# EAGLE board testeando_libs (EAGLE 7.2.0)
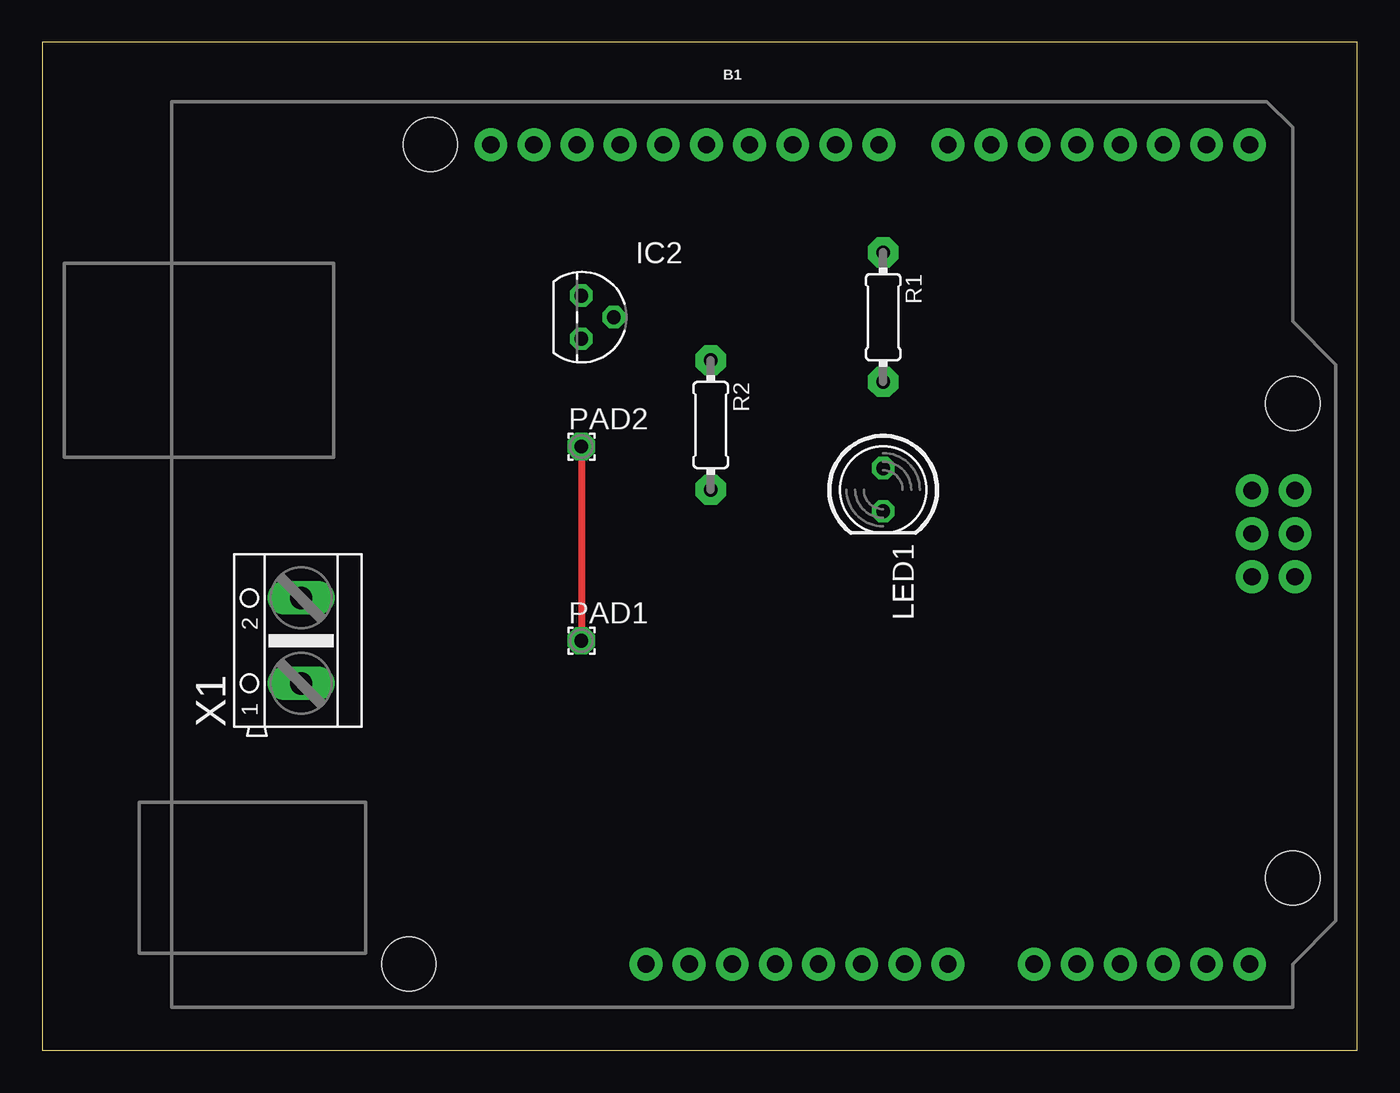
[diagram p0: board, top side]
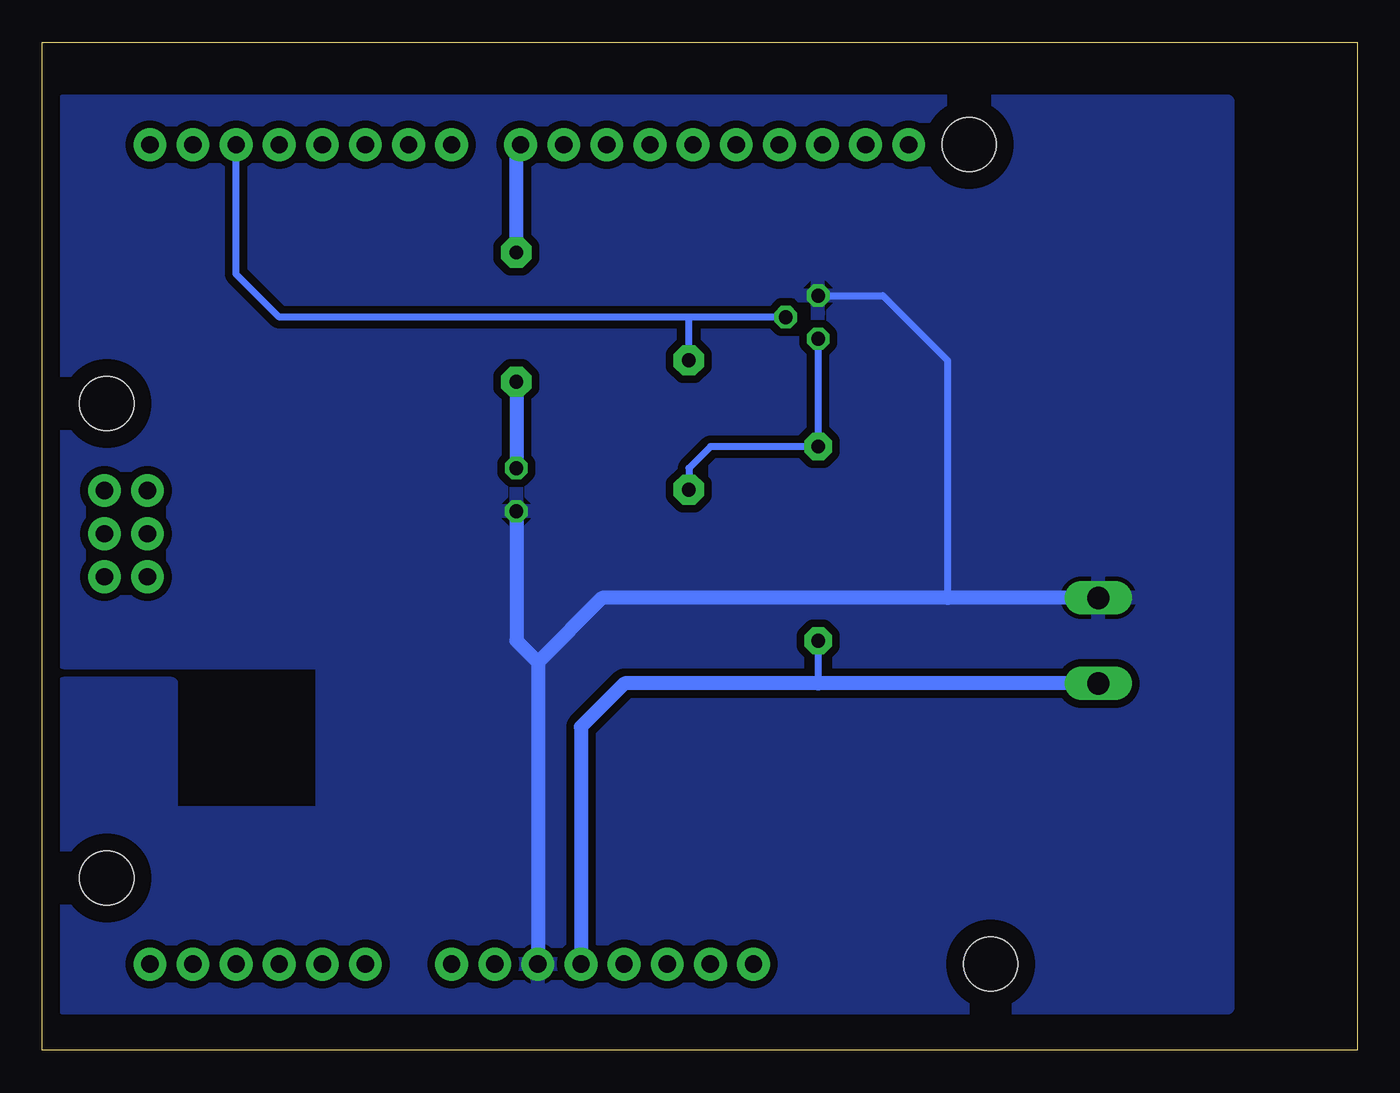
[diagram p1: board, bottom side, seen from below]

Size 77.45 x 59.36 mm. Coordinates in mm from the lower left corner, seen from the top.
Outline: 0,0 77.45,0 77.45,59.36 0,59.36 0,0
Copper layers (1*16): Top 0.035mm / dielectric 1.5mm / Bottom 0.035mm
Design rules "default *": minimum track width 10mil, minimum drill 24mil, track to track 18mil, track to pad 18mil, pad to pad 18mil, via to via 18mil, smd to smd 8mil, copper to edge 40mil, drill to drill 8mil, minimum pad ring 10mil, minimum via ring 8mil, stop-mask expansion 4mil, vias tented up to drill 0mil, thermal gap 10mil

## Footprints (pad centres in the part's own frame; a part is rotated, then mirrored left to right if it is on the bottom)
ARDUINO_R3 = drill 1.016 pad 1.93: 3.3V 2.54,-24.13; 5V 5.08,-24.13; A0 17.78,-24.13; A1 20.32,-24.13; A2 22.86,-24.13; A3 25.4,-24.13; A4 27.94,-24.13; A5 30.48,-24.13; AREF -9.144,24.13; D0 30.48,24.13; D1 27.94,24.13; D2 25.4,24.13; D3 22.86,24.13; D4 20.32,24.13; D5 17.78,24.13; D6 15.24,24.13; D7 12.7,24.13; D8 8.636,24.13; D9 6.096,24.13; D10 3.556,24.13; D11 1.016,24.13; D12 -1.524,24.13; D13 -4.064,24.13; GND@1 7.62,-24.13; GND@2 10.16,-24.13; GND@3 -6.604,24.13; GND@4 33.16,-1.32; IOREF -2.54,-24.13; MISO 30.62,3.76; MOSI 33.16,1.22; NC -5.08,-24.13; RESET@1 0,-24.13; RESET@2 30.62,-1.32; SCK 30.62,1.22; SCL -14.224,24.13; SDA -11.684,24.13; VCC 33.16,3.76; VIN 12.7,-24.13 | hole 3.175: -17.78,24.13; 33.02,8.89; 33.02,-19.05; -19.05,-24.13
TO92 = drill 0.813 octagon: 1 1.27,0; 2 0,1.905; 3 -1.27,0
LED5MM = drill 0.813 octagon: A -1.27,0; K 1.27,0
1,6/0,8 = drill 0.813 pad 1.6 octagon: 1 0,0
0204/7 = drill 0.813 pad 1.778 octagon: 1 -3.81,0; 2 3.81,0
AK500/2 = drill 1.321 long: 1 -2.515,0; 2 2.515,0

## Placement (x,y rotation side)
B1  ARDUINO_UNO_R3  [ARDUINO_R3]  40.64,29.21 0 top
IC2  DS18B20  [TO92]  31.75,43.18 270 top
LED1  [LED5MM]  49.53,33.02 270 top
PAD1  [1,6/0,8]  31.75,24.13 0 top
PAD2  [1,6/0,8]  31.75,35.56 0 top
R1  330  [0204/7]  49.53,43.18 270 top
R2  4k7  [0204/7]  39.37,36.83 270 top
U$1  LOGO_EEST_N5  [LOGO_EEST_N5_PAC_250]  62.23,15.24 0 top
X1  PWR  [AK500/2]  15.24,24.13 90 top

## Library data of the parts
B1 IC2 PAD1 PAD2 R1 R2 U$1 = treser_lib
LED1 = led
X1 = treser_lib; OC_FARNELL: unknown; OC_NEWARK: unknown

## Nets
GND: B1.GND@1 IC2.3 LED1.K X1.2
N$1: B1.D8 R1.1
N$2: LED1.A R1.2
N$3: B1.D2 IC2.2 R2.1
VCC: B1.5V IC2.1 PAD1.1 PAD2.1 R2.2 X1.1

## Tracks (layer width: path | path; a pad name or v marks a point on that pad's centre or on a via)
GND
  Bottom 0.406: IC2.3 27.94,44.45 24.13,40.64 24.13,26.64
  Bottom 0.813: X1.2 24.13,26.64 44.48,26.64 48.26,22.86 | 48.26,22.86 B1.GND@1 | LED1.K 49.53,24.13 48.26,22.86
  pour Bottom: 7.62,2.54 7.62,55.88 76.2,55.88 76.2,22.86 60.96,22.86 60.96,13.97 69.85,13.97 69.85,21.59 76.2,21.59 76.2,2.54
N$1
  Bottom 0.813: R1.1 49.53,53.09 B1.D8
N$2
  Bottom 0.813: R1.2 LED1.A
N$3
  Bottom 0.406: IC2.2 39.37,43.18 | 39.37,43.18 63.5,43.18 66.04,45.72 B1.D2 | R2.1 39.37,43.18
VCC
  Top 0.406: PAD2.1 PAD1.1
  Bottom 0.406: PAD1.1 31.75,21.61 | IC2.1 PAD2.1 38.1,35.56 39.37,34.29 R2.2
  Bottom 0.813: X1.1 31.75,21.61 43.16,21.61 45.72,19.05 B1.5V